# Altium PCB FASTCHARGE.PcbDoc
Units mm, origin at the board's own origin, x right, y up, seen from the top; angles counter-clockwise.
Board outline 48.26 x 26.04 mm, 2 copper layers (Top Layer, Bottom Layer); 19 components, 12 nets, 68 pads, 1 vias.
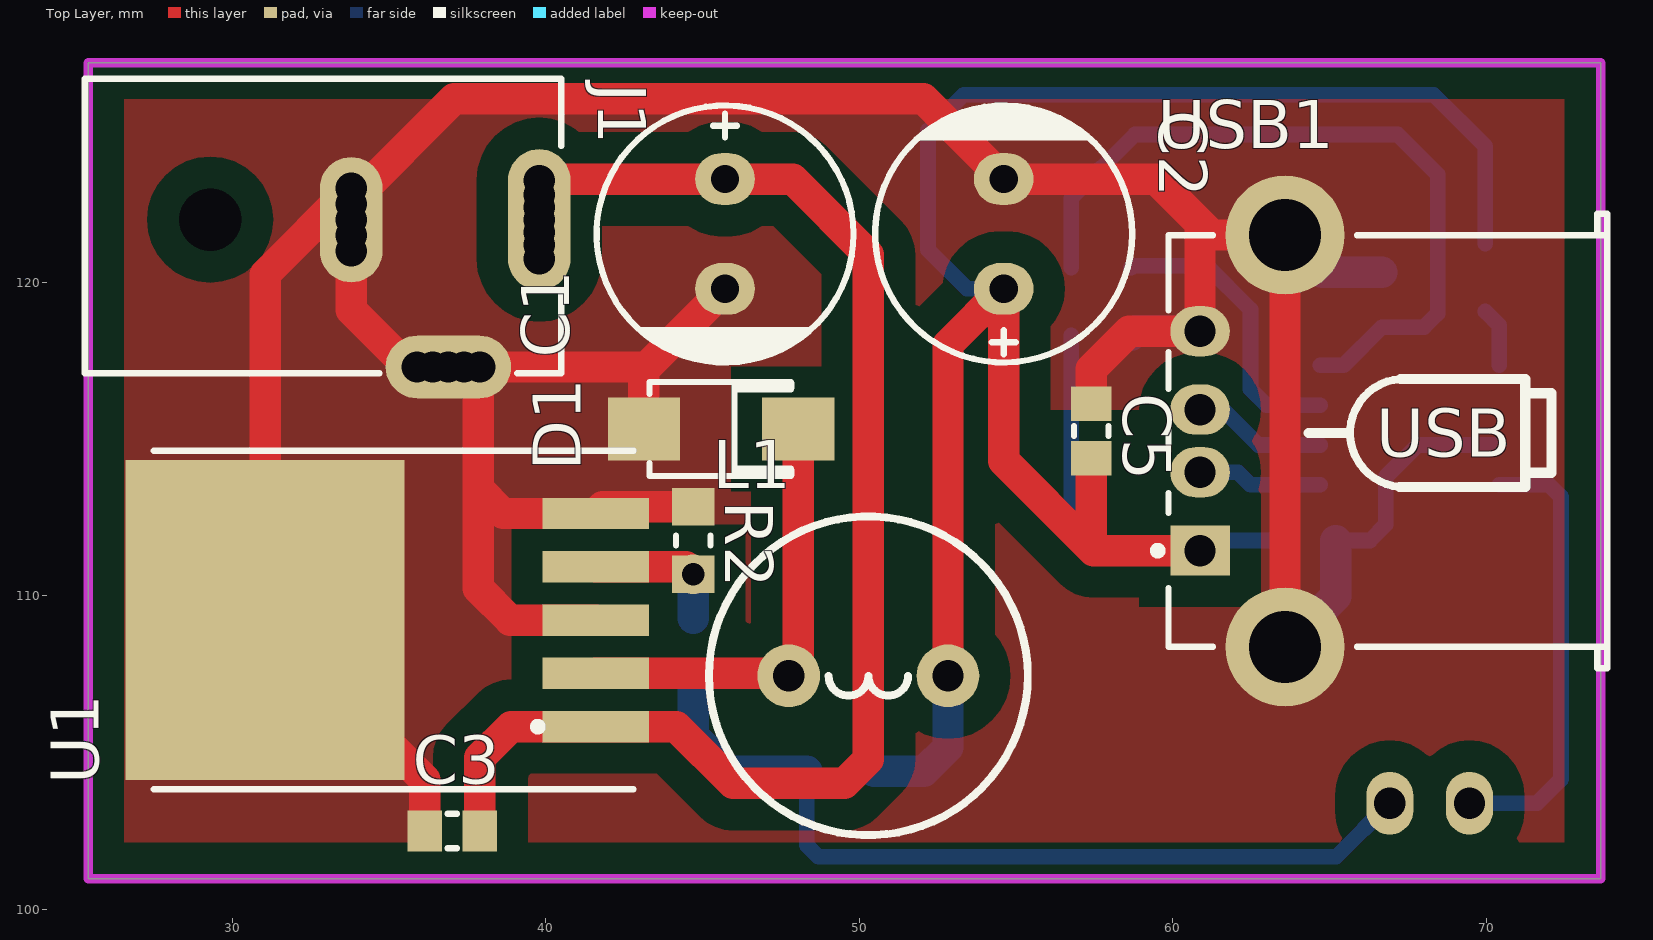
[diagram p0: Top Layer view]
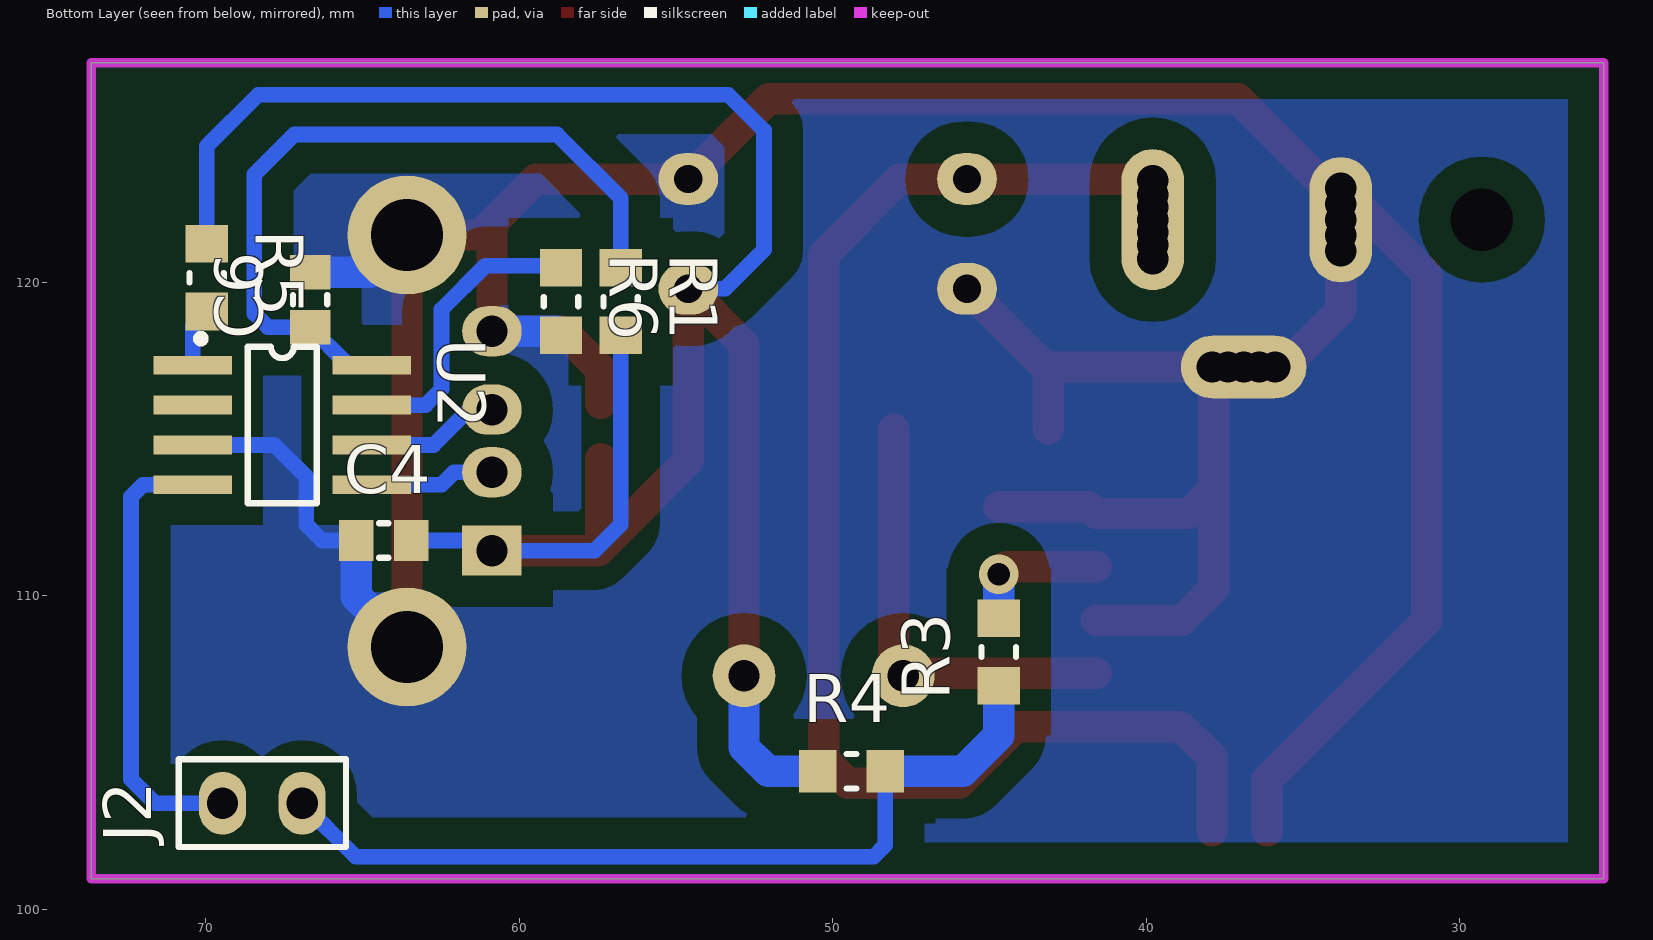
[diagram p1: Bottom Layer view, seen from below]
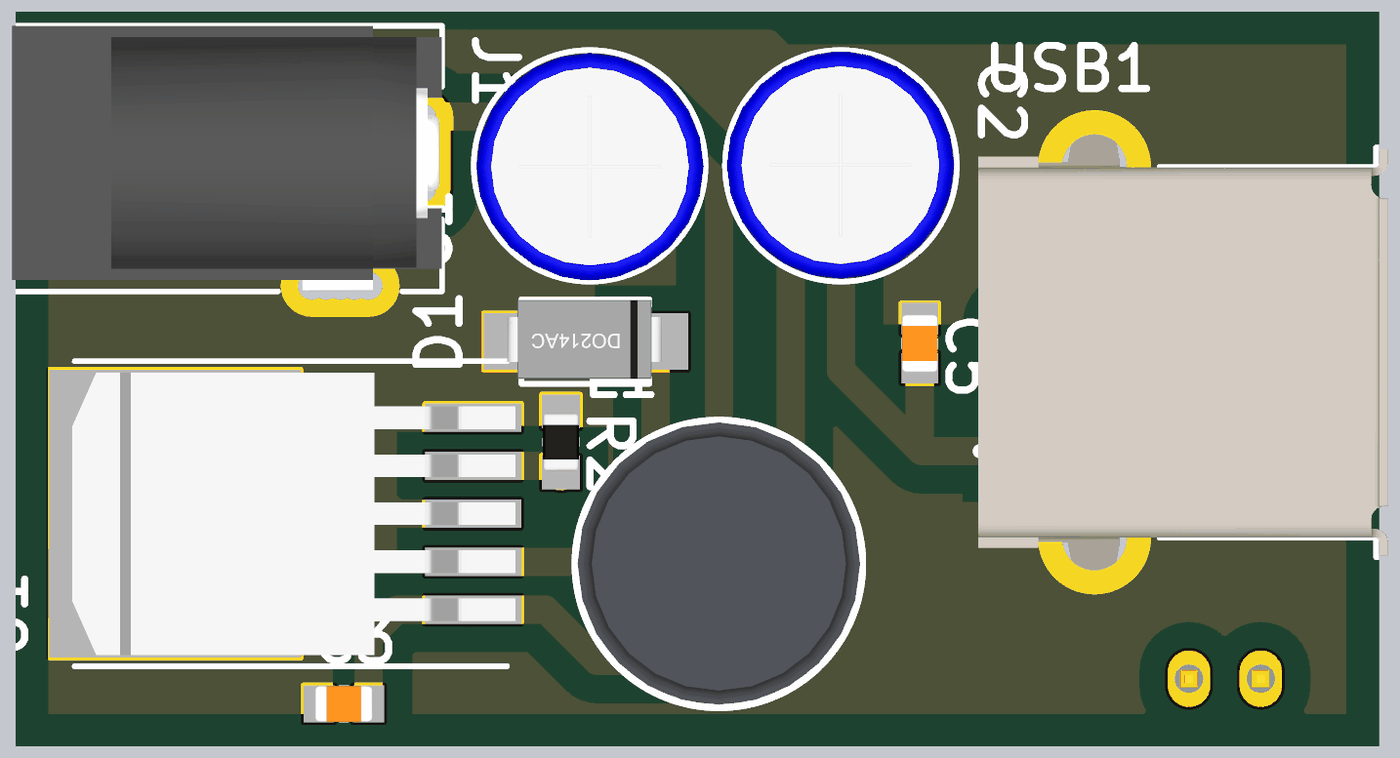
[diagram p2: 3D render of the assembled board from above, using the file's embedded part models]
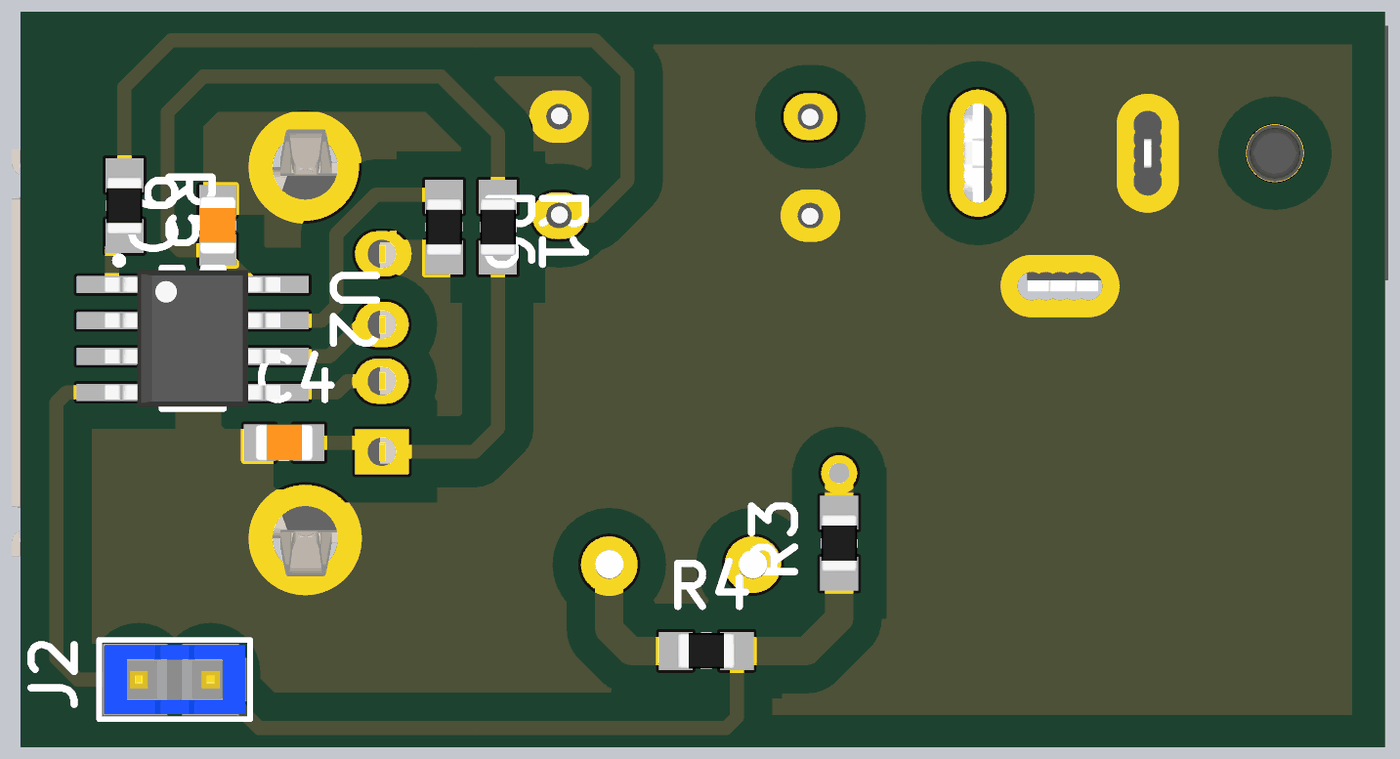
[diagram p3: 3D render of the assembled board from below, using the file's embedded part models]

## Layer stack, top to bottom
Top Solder: solder mask 0.0102, Solder Resist, Dk 3.5
Top Layer: signal copper 0.0356
Dielectric 1: dielectric 0.32, FR-4, Dk 4.8
Bottom Layer: signal copper 0.0356
Bottom Solder: solder mask 0.0102, Solder Resist, Dk 3.5

## Board outline
25.4,100.965 73.66,100.965 73.66,127 25.4,127

## Design rules (kind name [scope] priority, off if disabled: settings)
Clearance [All] p1: gap=0.3
PlaneConnect [All] p1: planeconnectstyle=Direct reliefexpansion=0.508 reliefentries=4 reliefconductorwidth=0.254 reliefairgap=0.254
PolygonConnect [All] p1: connectstyle=Direct reliefconductorwidth=0.254 reliefentries=4 polygonreliefangle="90 Angle" airgapwidth=0.254
RoutingVias [All] p1: holewidth=0.711 width=1.27 viastyle="Through Hole" minholewidth=0.711 minwidth=1.27 maxholewidth=0.711 maxwidth=1.27
SolderMaskExpansion [All] p1: expansion=0.102
Width [All] p1: maxlimit=2.54 minlimit=0.254 preferedwidth=0.508
29 further rules are at their usual default settings.

## Components (designator, comment, footprint, x,y, rotation, side; value= is the part's Value field where it differs from the comment)
C1 "470uF" "Cap 3.5mm" 45.72,121.539 r90 top
C2 "470uF" "Cap 3.5mm" 54.61,121.539 r270 top
C3 "100nF" "SMD 0805" 36.195,102.489 r0 top
C4 "100nF" "SMD 0805" 65.151,111.76 r180 bottom
C5 "100nF" "SMD 0805" 57.404,116.078 r270 top
C6 "100nF" "SMD 0805" 66.675,118.618 r90 bottom
D1 "SS34" "DIODE DO-214AC SMD" 45.593,115.316 r90 top
J1 "Power jack" "Power Jack" 34.544,120.269 r0 top
J2 "JUMPER" "Jumper Header 2X1" 68.199,103.378 r0 bottom
L1 "100uH" "Inductor 5.8mm" 50.292,107.442 r0 top
R1 "RESISTOR" 0805_1/8W 56.769,119.38 r270 bottom
R2 "RESISTOR" 0805_1/8W 44.704,111.76 r90 top
R3 "RESISTOR" 0805_1/8W 44.704,108.204 r90 bottom
R4 "RESISTOR" 0805_1/8W 49.403,104.394 r180 bottom
R5 "RESISTOR" 0805_1/8W 69.977,120.142 r270 bottom
R6 "RESISTOR" 0805_1/8W 58.674,119.38 r270 bottom
U1 "LM2596 Adj" "TO-263 5 LEAD" 36.322,109.22 r90 top
U2 "CHY103" "SOIC 8-Lead  (3.8mm)" 67.564,115.443 r180 bottom
USB1 "USB Connector-B Type" USB2.5-2H4C 62.23,114.935 r0 top

## Footprints (in the part's own frame and the unit in brackets; to place one, negate y for a bottom-side part, rotate by r counter-clockwise, add the part's x,y. Pads: shape width x height; smd on the part's side, far side on the other; paste and mask are expansions set on the pad)
0805_1/8W [mm] "Chip Resistor, 2-Leads, Body 2.0x1.3mm, IPC High Density _ (0.100 W)"
  rect 1.2x1.35 smd: 1(-1.079,0) 2(1.079,0)
  silkscreen extent -0.15,-0.55 0.15,0.55, body extent -1.02,-0.64 1.02,0.64, height 0.6
"Cap 3.5mm" [mm]
  oval 1.651x1.905 hole 0.9: 1(1.75,0) 2(-1.75,0)
  silkscreen extent -4.1,-4.1 4.1,4.1, body extent -4.05,-4.04 4,4.01, height 12.03
"DIODE DO-214AC SMD" [mm]
  rect 2x2.3 smd: 1(0,2.462) 2(0,-2.462)
  silkscreen extent -1.5,-2.34 1.5,2.29, body extent -1.32,-2.69 1.47,2.79, height 2.24
"Inductor 5.8mm" [mm]
  round 2 hole 1: 1(-2.54,0) 2(2.54,0)
  silkscreen extent -5.09,-5.08 5.09,5.08, body extent -5,-4.98 5,5.02, height 13.49
"Jumper Header 2X1" [mm]
  oval 1.5x2 hole 1: 1(-1.27,0) 2(1.27,0)
  silkscreen extent -2.67,-1.4 2.67,1.4, body extent -2.54,-1.27 2.54,1.27, height 8.57
"Power Jack" [mm] "Power Adaptor Jack"
  round 1.5 hole 1: 1(5.25,0.475) 1(5.25,0.925) 1(5.25,1.325) 1(5.25,2.125) 1(5.25,2.525) 1(5.25,2.975) 2(-0.75,0.725) 2(-0.75,2.725) 2(-0.75,1.225) 2(-0.75,2.225) 3(1.35,-2.975) 3(1.85,-2.975) 3(2.85,-2.975) 3(3.35,-2.975)
  oval 2x4.5 hole 1: 1(5.25,1.725)
  oval 2x4 hole 1: 2(-0.75,1.725)
  oval 4x2 hole 1: 3(2.35,-2.975)
  round 1.9 hole 2: MH(-5.25,1.725)
  silkscreen extent -9.25,-3.17 5.95,6.23, body extent -9.25,-3.17 5.95,6.23, height 11
"SMD 0805" [mm]
  rect 1.1x1.3 smd: 1(-0.051,0) 2(1.701,0)
  silkscreen extent 0.67,-0.55 0.97,0.55, body extent -0.19,-0.63 1.84,0.63, height 0.65
"SOIC 8-Lead  (3.8mm)" [mm]
  rect 2.5x0.6 smd: 1(-2.854,1.905) 2(-2.854,0.635) 3(-2.854,-0.635) 4(-2.854,-1.905) 5(2.854,-1.905) 6(2.854,-0.635) 7(2.854,0.635) 8(2.854,1.905)
  silkscreen extent -2.72,-2.5 1.1,2.88, body extent -3.1,-2.41 3.1,2.41, height 1.7
"TO-263 5 LEAD" [mm]
  rect 1x3.4 smd: 1(-3.4,-5.275) 2(-1.7,-5.275) 3(0,-5.275) 4(1.7,-5.275) 5(3.4,-5.275)
  rect 10.2x8.9 smd: 6(0,5.275)
  silkscreen extent -5.4,-6.48 5.4,8.82, body extent -5,-6.77 5,8.9, height 4.78
USB2.5-2H4C [mm] "Connector; USB1.1, Type A, Thru-Hole; 4 Position; Right Angle"
  rect 1.9x1.6 hole 1: 1(-1.355,-3.5)
  oval 1.9x1.6 hole 1: 2(-1.355,-1) 3(-1.355,1) 4(-1.355,3.5)
  round 3.8 hole 2.3: 5(1.355,6.57) 6(1.355,-6.57)
  silkscreen extent -2.83,-7.25 11.64,7.25, body extent -2.77,-7.9 11.73,7.9, height 7.35

## Part data
C1 C2: library part CAP
C3 C4 C5 C6: library part "CAP NON"
D1: library part Diode
L1: library part Inductor, "Inductor"
U1: library part "LM2576 SMD"

## Via types
v1: diameter 1.27, hole 0.711, Top Layer to Bottom Layer, 1 vias

## Nets (pads, with @x,y where several pads share a name; then routed paths per layer and width w, separated by ;. In a path a pad name is that pad's centre, name@x,y a point inside that pad or via, vN(x,y) a via of type N, cw(c..) or ccw(c..) an arc to the next point about the centre after c; other vN are vias at no path point)
GND: C1.2 C2.2 C3.1 C4.1 C5.1 C6.2 D1.1 J1.2 J1.3 R2.2 R6.2 U1.3 U1.5 U1.6 U2.3 USB1.4 USB1.5 USB1.6 | length 133.5
  Top Layer w1: J1.2@33.794,122.994 31.047,120.247 U1.6 36.144,104.123 C3.1 ; U1.3 38.862,109.22 37.846,110.236 37.846,113.411 ; D1.1 43.131,117.2 43.225,117.294 ; R2.2 41.816,112.839 U1.5 38.637,112.62 37.846,113.411 ; C1.2 43.225,117.294 ; C5.1 57.404,117.221 58.618,118.435 USB1.4 60.875,121.878 ; USB1.6 USB1.5 61.248,121.505 60.875,121.878 ; J1.3@37.394,117.294 36.894,117.294 36.394,117.294 35.894,117.294 35.614,117.294 33.794,119.114 33.794,121.494 33.794,122.494 33.794,122.567 37.084,125.857 52.042,125.857 C2.2 59.464,123.289 60.875,121.878 ; J1.3@37.394,117.294 37.894,117.294 43.225,117.294 ; J1.3@37.394,117.294 37.846,116.842 37.846,113.411
  Bottom Layer w0.5: C4.1 66.294,111.76 66.802,112.268 66.802,113.792 67.818,114.808 U2.3
  Bottom Layer w1: R6.2 58.808,118.435 USB1.4 ; USB1.6 65.202,109.982 C4.1 ; USB1.5 64.771,120.319 C6.2
NetC1_1: C1.1 C3.2 J1.1 U1.1 | length 44
  Top Layer w1: C3.2 37.896,104.825 38.891,105.82 U1.1 44.167,105.82 45.974,104.013 49.53,104.013 50.292,104.775 50.292,120.876 47.879,123.289 C1.1 40.289,123.289 J1.1@39.794,122.794
NetC6_1: C6.1 R1.1 U2.8 | length 24.1
  Bottom Layer w0.5: R1.1 56.769,122.682 58.801,124.714 67.183,124.714 68.453,123.444 68.453,118.999 68.021,118.567 C6.1 65.456,117.348 U2.8
NetD1_2: D1.2 L1.1 U1.2 | length 14.2
  Top Layer w1: U1.2 47.674,107.52 L1.1 48.055,107.745 D1.2
NetJ2_1: J2.1 R3.1 R4.2 | length 27.5
  Bottom Layer w0.5: R4.2 48.324,102.044 48.703,101.665 65.216,101.665 J2.1
  Bottom Layer w1: R3.1 44.704,105.537 45.847,104.394 R4.2
NetJ2_2: J2.2 U2.4 | length 14.4
  Bottom Layer w0.5: J2.2 71.628,103.378 72.39,104.14 72.39,113.157 72.009,113.538 U2.4
NetR2_1: R2.1 R3.2 U1.4 | length 4.6
  Top Layer w1: U1.4 44.465,110.92 v1(44.704,110.681)
  Bottom Layer w1: R3.2 v1(44.704,110.681)
NetR5_2: R5.2 U2.1 | length 1.9
  Bottom Layer w0.5: R5.2 70.418,118.622 U2.1
NetR6_1: R6.1 U2.7 | length 9.4
  Bottom Layer w0.5: R6.1 58.738,120.523 61.087,120.523 62.484,119.126 62.484,116.586 62.992,116.078 U2.7
NetU2_5: U2.5 USB1.2 | length 4
  Bottom Layer w0.5: USB1.2 62.087,113.935 62.484,113.538 U2.5
NetU2_6: U2.6 USB1.3 | length 4.3
  Bottom Layer w0.5: USB1.3 61.611,115.935 62.738,114.808 U2.6
VCC: C2.1 C4.2 C5.2 L1.2 R1.2 R4.1 R5.1 USB1.1 | length 75.8
  Top Layer w1: L1.2 52.832,118.011 C2.1 54.61,114.3 57.404,111.506 ; C5.2 57.404,111.506 ; USB1.1 57.475,111.435 57.404,111.506
  Bottom Layer w0.5: C2.1 53.439,119.789 52.197,121.031 52.197,124.841 53.34,125.984 68.326,125.984 69.977,124.333 R5.1 ; R1.2 56.769,112.268 57.602,111.435 USB1.1 61.2,111.76 C4.2
  Bottom Layer w1: R4.1 52.07,104.394 52.832,105.156 L1.2
pads on no net: J1.MH U2.2

## Polygon pours and split planes (outlines as drawn)
GND on Bottom Layer "Top Layer-No Net" (solid, remove dead copper, pour order 2): 25.4,127 73.66,127 73.66,101.092 73.533,100.965 25.4,100.965
GND on Top Layer "Top Layer-No Net" (solid, remove dead copper, pour order 4): 25.4,127 73.66,127 73.66,100.965 25.4,100.965

## Keep-outs
Keep-Out Layer:
  the board outline again, w0.3

## Text inside footprints (layer, text, board x,y; h text height)
USB1: Top Overlay "USB" at 66.499,114.427 h1.52